# EAGLE board SensorModuleV2 (EAGLE 8.1.1)
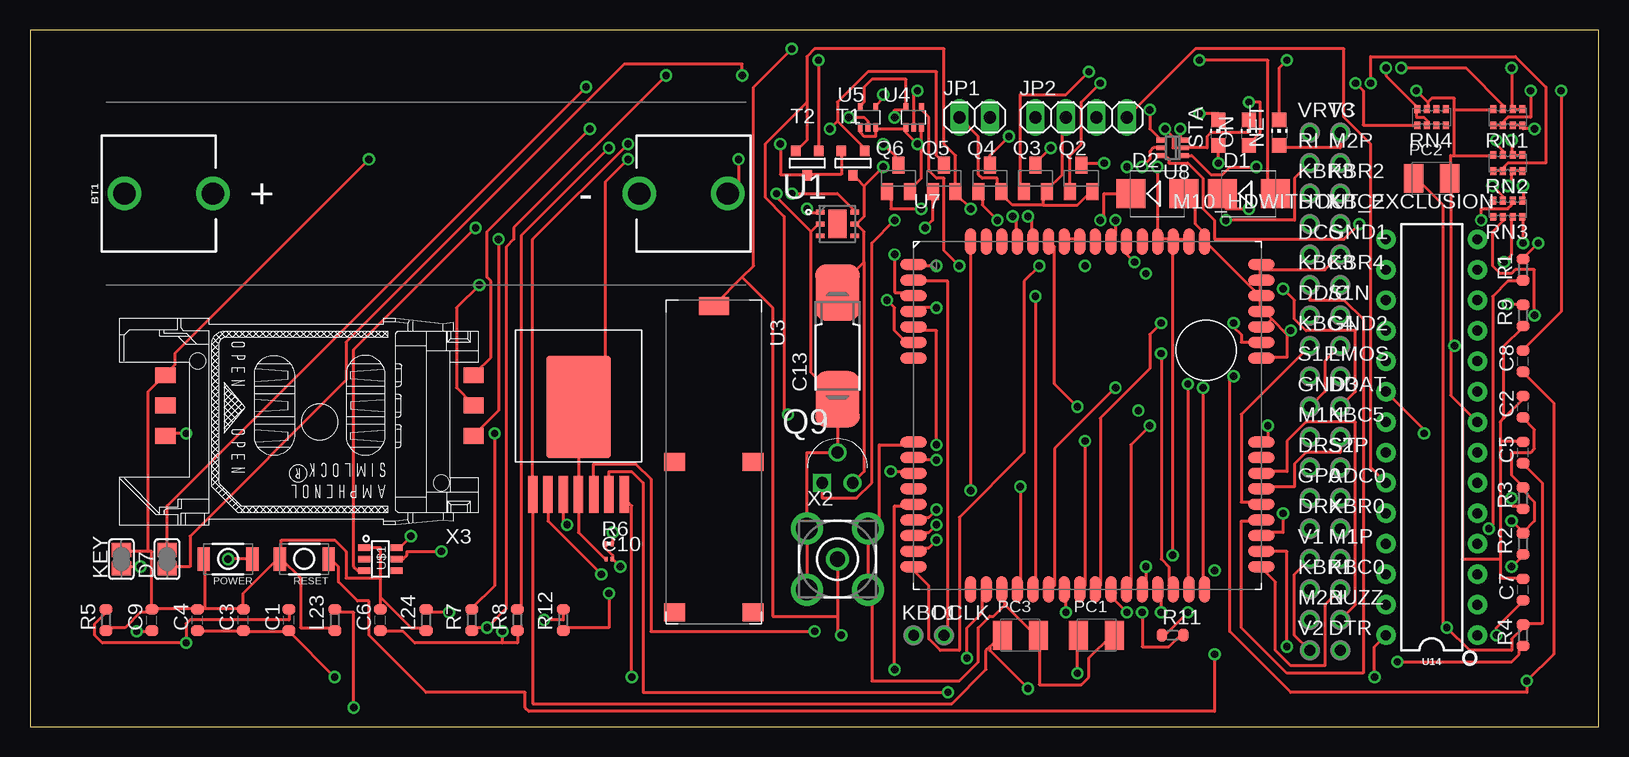
[diagram p0: board, top side]
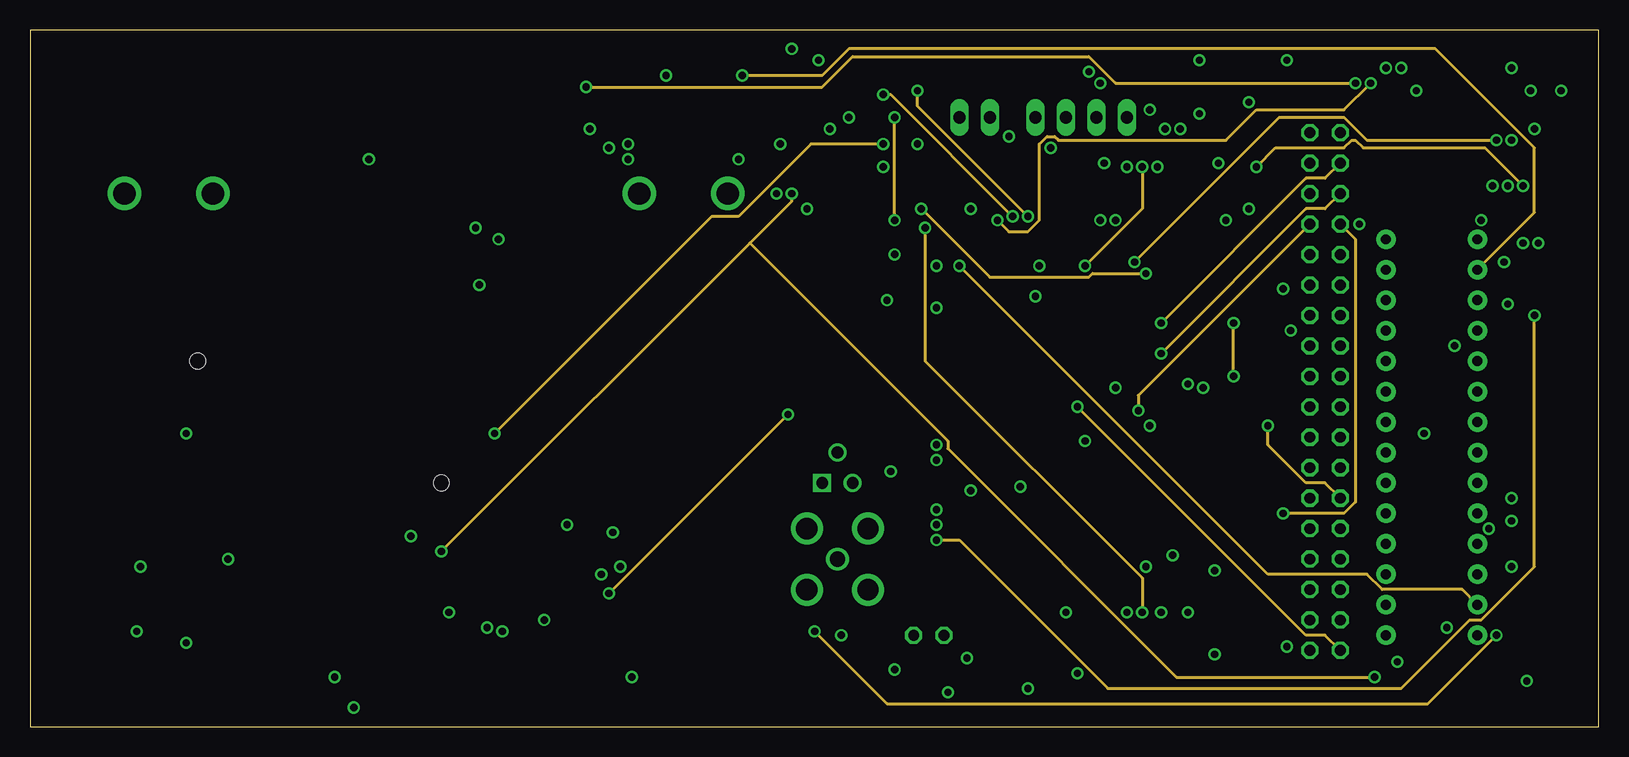
[diagram p1: board, inner layer Route2]
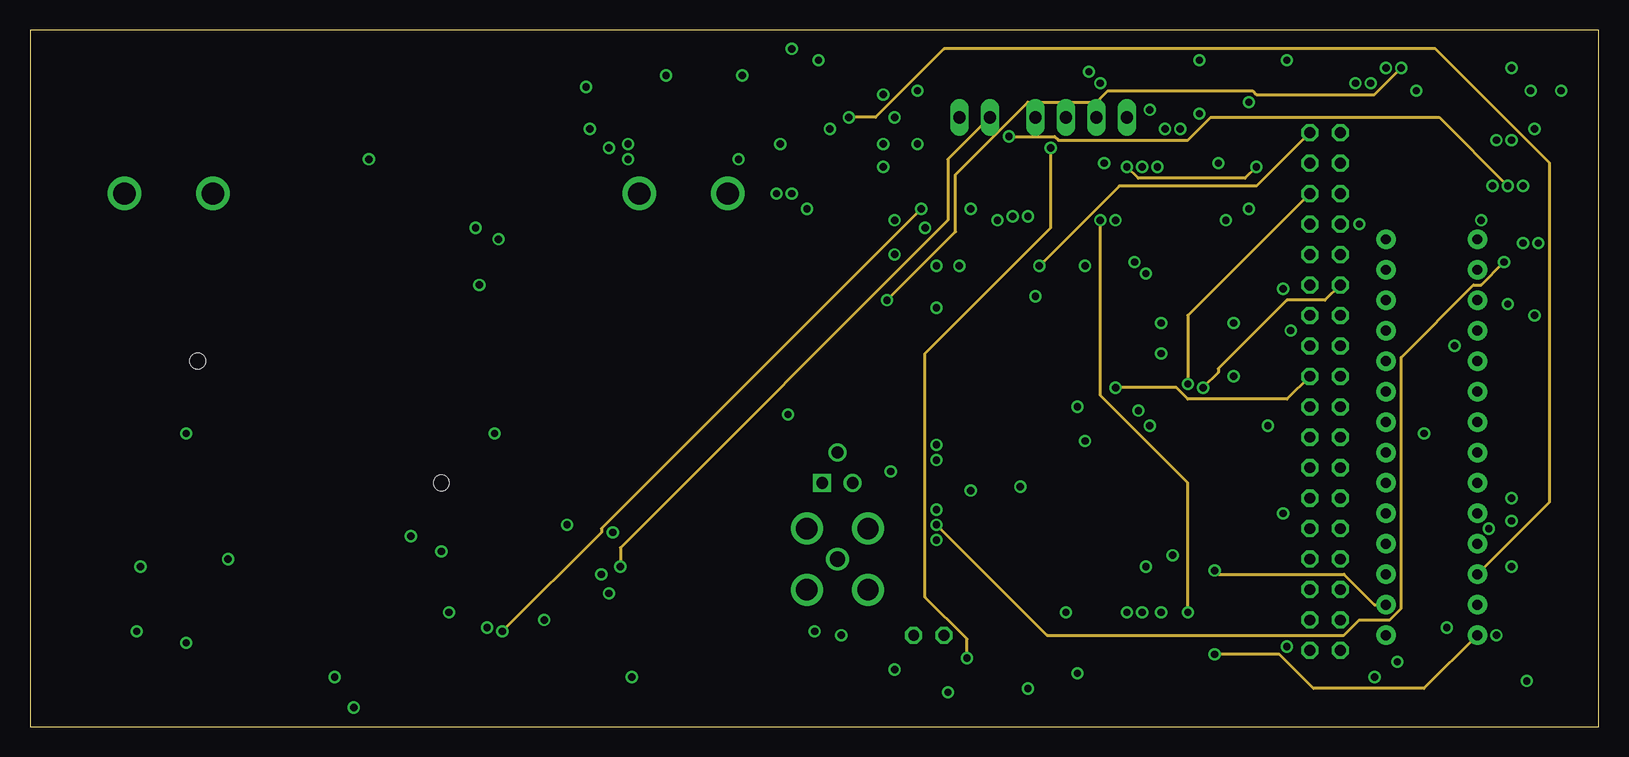
[diagram p2: board, inner layer Route3]
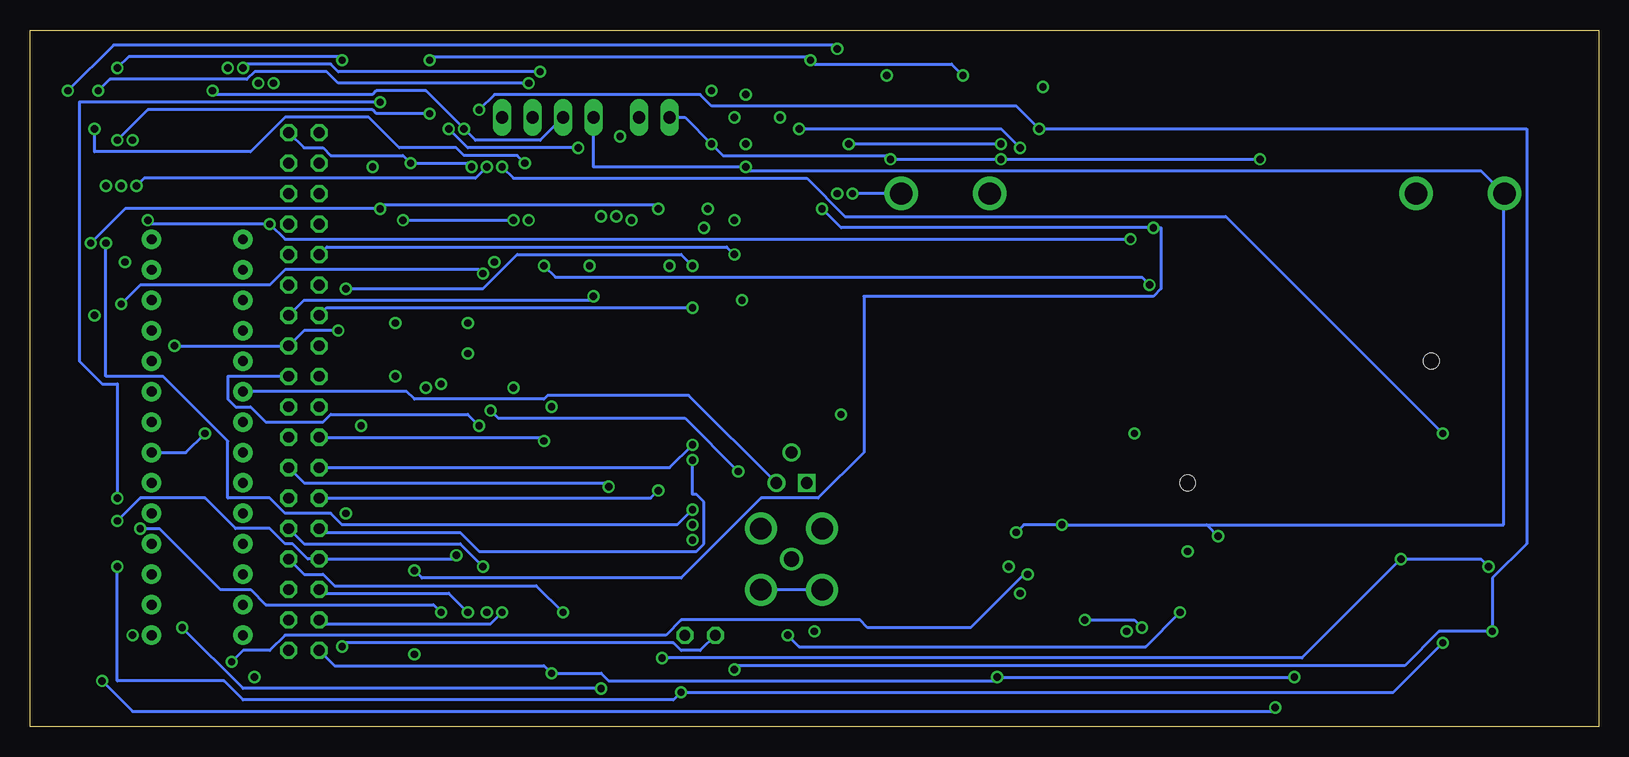
[diagram p3: board, bottom side, seen from below]

Size 130.79 x 58.09 mm. Coordinates in mm from the lower left corner, seen from the top.
Outline: 0,0 130.79,0 130.79,58.09 0,58.09 0,0
Copper layers (1*2*3*16): Top 0.035mm / dielectric 1.5mm / Route2 0.035mm / dielectric 0.15mm / Route3 0.035mm / dielectric 0.2mm / Bottom 0.035mm
Design rules "default *": minimum track width 10mil, minimum drill 24mil, track to track 8mil, track to pad 8mil, pad to pad 8mil, via to via 8mil, smd to smd 8mil, copper to edge 40mil, drill to drill 8mil, minimum pad ring 10mil, minimum via ring 8mil, stop-mask expansion 4mil, vias tented up to drill 0mil, thermal gap 10mil
Net classes: 4 antenna: clearance 0.61 mm

## Footprints (pad centres in the part's own frame; a part is rotated, then mirrored left to right if it is on the bottom)
P1-09 = drill 0.9 pad 1.422 octagon: TP 0,0
BATTERY-AA = drill 1.854: GND@1 25.146,0; GND@2 17.78,0; PWR@1 -25.146,0; PWR@2 -17.78,0
C0603-ROUND = smd 0.898 x 1.1: 1 -0.889,0; 2 0.889,0
C0201 = smd 0.25 x 0.35: 1 -0.25,0; 2 0.25,0
085CS_1AW = smd 4.7 x 3.7: + 4.45,0; - -4.45,0
SMB = smd 2.4 x 2.4: A 2.2,0; C -2.2,0
SJ = smd 1.168 x 1.6: 1 -0.762,0; 2 0.762,0
1X02 = drill 1.016 long: 1 -1.27,0; 2 1.27,0
1X04 = drill 1.016 long: 1 -3.81,0; 2 -1.27,0; 3 1.27,0; 4 3.81,0
R0603-ROUND = smd 0.898 x 1.1: 1 -0.889,0; 2 0.889,0
CHIP-LED0805 = smd 1.2 x 1.2: A 0,-1.05; C 0,1.05
SMC_B = smd 1.6 x 2.4: + -1.5,0; - 1.5,0
SMD_157SW = smd 1.016 x 1.981: 1 -2.032,0; 2 2.032,0
SOT23-BEC = smd 1 x 1.4: B -0.95,-1.1; C 0,1.1; E 0.95,-1.1
TO127P254X749-3 = drill 0.991 square: 1 -2.54,-2.54 | drill 0.991: 2 -1.27,0; 3 0,-2.54
R0201 = smd 0.28 x 0.43: 1 -0.255,0; 2 0.255,0
CAY16 = smd 0.5 x 0.65: 1 -1.2,-0.675; 2 -0.4,-0.675; 3 0.4,-0.675; 4 1.2,-0.675; 5 1.2,0.675; 6 0.4,0.675; 7 -0.4,0.675; 8 -1.2,0.675
SOT-23 = smd 0.787 x 0.889: 1 0.025,-1.016; 2 -0.94,1.016; 3 0.991,1.016
DFN300X300X110-7N = smd 0.711 x 0.406: 1 -1.448,0.991; 2 -1.448,0; 3 -1.448,-0.991; 4 1.448,-0.991; 5 1.448,0; 6 1.448,0.991 | smd 1.499 x 2.388: 7 0,0
CALVUS_5BAND_SMD_A10340_0MM_EXCLUSION = smd 2.5 x 1.5: FEED 3.95,0.5 | smd 1.75 x 1.5: FIXINGPOINT$1 0.7,26.05; FIXINGPOINT$2 7.22,26.05; FIXINGPOINT$3 0.7,13.49; FIXINGPOINT$4 7.22,13.49
SC70-5 = smd 0.4 x 0.7: 1 -0.65,-0.85; 2 0,-0.85; 3 0.65,-0.85; 4 0.65,0.85; 5 -0.65,0.85
TZA-7 = smd 0.89 x 3.06: 1 -3.81,-7.305; 2 -2.54,-7.305; 3 -1.27,-7.305; 4 0,-7.305; 5 1.27,-7.305; 6 2.54,-7.305; 7 3.81,-7.305 | smd 5.35 x 8.54: TAB 0,0
M10_HD_WITHOUT_EXCLUSION = smd 2.2 x 0.9: P$1 0,27.1; P$2 0,25.8; P$3 0,24.5; P$4 0,23.2; P$5 0,21.9; P$6 0,20.6; P$7 0,19.3; P$8 0,12.3; P$9 0,11; P$10 0,9.7; P$11 0,8.4; P$12 0,7.1; P$13 0,5.8; P$14 0,4.5; P$15 0,3.2; P$16 0,1.9; P$33 29,1.9; P$34 29,3.2; P$35 29,4.5; P$36 29,5.8; P$37 29,7.1; P$38 29,8.4; P$39 29,9.7; P$40 29,11; P$41 29,12.3; P$42 29,19.3; P$43 29,20.6; P$44 29,21.9; P$45 29,23.2; P$46 29,24.5; P$47 29,25.8; P$48 29,27.1 | smd 0.9 x 2.2: P$17 4.75,0; P$18 6.05,0; P$19 7.35,0; P$20 8.65,0; P$21 9.95,0; P$22 11.25,0; P$23 12.55,0; P$24 13.85,0; P$25 15.15,0; P$26 16.45,0; P$27 17.75,0; P$28 19.05,0; P$29 20.35,0; P$30 21.65,0; P$31 22.95,0; P$32 24.25,0; P$49 24.25,29; P$50 22.95,29; P$51 21.65,29; P$52 20.35,29; P$53 19.05,29; P$54 17.75,29; P$55 16.45,29; P$56 15.15,29; P$57 13.85,29; P$58 12.55,29; P$59 11.25,29; P$60 9.95,29; P$61 8.65,29; P$62 7.35,29; P$63 6.05,29; P$64 4.75,29
SC70_6L = smd 0.4 x 0.85: P$1 -0.65,-0.94; P$2 0,-0.94; P$3 0.65,-0.935; P$4 0.65,0.94; P$5 0,0.94; P$6 -0.65,0.94
DIP28 = drill 0.813 pad 1.626: 1 -16.51,-3.81; 2 -13.97,-3.81; 3 -11.43,-3.81; 4 -8.89,-3.81; 5 -6.35,-3.81; 6 -3.81,-3.81; 7 -1.27,-3.81; 8 1.27,-3.81; 9 3.81,-3.81; 10 6.35,-3.81; 11 8.89,-3.81; 12 11.43,-3.81; 13 13.97,-3.81; 14 16.51,-3.81; 15 16.51,3.81; 16 13.97,3.81; 17 11.43,3.81; 18 8.89,3.81; 19 6.35,3.81; 20 3.81,3.81; 21 1.27,3.81; 22 -1.27,3.81; 23 -3.81,3.81; 24 -6.35,3.81; 25 -8.89,3.81; 26 -11.43,3.81; 27 -13.97,3.81; 28 -16.51,3.81
SOT-23-6 = smd 1 x 0.55: 1 -1.35,0.95; 2 -1.35,0; 3 -1.35,-0.95; 4 1.35,-0.95; 5 1.35,0; 6 1.35,0.95
BU-SMA-V = drill 1.27: 1 0,0 | drill 1.778: 2 -2.55,2.55; 3 2.55,2.55; 4 2.55,-2.55; 5 -2.55,-2.55
CON-AMPHENOL_C707_10M006_512_2 = smd 1.7 x 1.3: C1 -12.85,-3.915; C2 -12.85,-1.375; C3 -12.85,1.165; C5 12.85,-3.915; C6 12.85,-1.375; C7 12.85,1.165 | hole 1.3: 10.16,-5.08; -10.16,5.08

## Placement (x,y rotation side)
ADC0  TPPAD1-09  [P1-09]  109.22,19.05 0 top
BT1  4.5V Battery  [BATTERY-AA]  33.02,44.45 0 top
BUZZ  TPPAD1-09  [P1-09]  109.22,8.89 0 top
C1  10n  [C0603-ROUND]  21.59,8.89 90 top
C2  100n  [C0603-ROUND]  124.46,26.67 90 top
C3  15p  [C0603-ROUND]  17.78,8.89 90 top
C4  56p  [C0603-ROUND]  13.97,8.89 90 top
C5  100n  [C0603-ROUND]  124.46,22.86 90 top
C6  220p_NM  [C0603-ROUND]  29.21,8.89 90 top
C7  10n  [C0603-ROUND]  124.46,11.43 90 top
C8  3.9pF Murata GQM1885C2A3R9BB01D  [C0603-ROUND]  124.46,30.48 90 top
C9  1u  [C0603-ROUND]  10.16,8.89 90 top
C10  1u  [C0201]  48.26,13.97 0 top
C13  2200u - 592D228X96R3X2T20H  [085CS_1AW]  67.31,31.75 90 top
D1  5V1  [SMB]  101.6,44.45 0 top
D2  5V1  [SMB]  93.98,44.45 0 top
D7  [SJ]  11.43,13.97 90 top
DCLK  TPPAD1-09  [P1-09]  76.2,7.62 0 top
DCS  TPPAD1-09  [P1-09]  106.68,39.37 0 top
DD/C  TPPAD1-09  [P1-09]  106.68,34.29 0 top
DDAT  TPPAD1-09  [P1-09]  109.22,26.67 0 top
DRST  TPPAD1-09  [P1-09]  106.68,21.59 0 top
DRX  TPPAD1-09  [P1-09]  106.68,16.51 0 top
DTR  TPPAD1-09  [P1-09]  109.22,6.35 0 top
DTX  TPPAD1-09  [P1-09]  106.68,41.91 0 top
GND1  TPPAD1-09  [P1-09]  109.22,39.37 0 top
GND2  TPPAD1-09  [P1-09]  109.22,31.75 0 top
GND3  TPPAD1-09  [P1-09]  106.68,26.67 0 top
GP0  TPPAD1-09  [P1-09]  106.68,19.05 0 top
JP1  Solar Array  [1X02]  78.74,50.8 0 top
JP2  Soil Hydrometer  [1X04]  87.63,50.8 0 top
KBC0  TPPAD1-09  [P1-09]  109.22,11.43 0 top
KBC1  TPPAD1-09  [P1-09]  73.66,7.62 0 top
KBC2  TPPAD1-09  [P1-09]  109.22,41.91 0 top
KBC3  TPPAD1-09  [P1-09]  106.68,36.83 0 top
KBC4  TPPAD1-09  [P1-09]  106.68,31.75 0 top
KBC5  TPPAD1-09  [P1-09]  109.22,24.13 0 top
KBR0  TPPAD1-09  [P1-09]  109.22,16.51 0 top
KBR1  TPPAD1-09  [P1-09]  106.68,11.43 0 top
KBR2  TPPAD1-09  [P1-09]  109.22,44.45 0 top
KBR3  TPPAD1-09  [P1-09]  106.68,44.45 0 top
KBR4  TPPAD1-09  [P1-09]  109.22,36.83 0 top
KEY  [SJ]  7.62,13.97 90 top
L23  6.8nH Murata LQG18HN6N8J00D  [R0603-ROUND]  25.4,8.89 90 top
L24  3.3nH Murata LQG18HN3N3S00D  [R0603-ROUND]  33.02,8.89 90 top
LMOS  TPPAD1-09  [P1-09]  109.22,29.21 0 top
M1N  TPPAD1-09  [P1-09]  106.68,24.13 0 top
M1P  TPPAD1-09  [P1-09]  109.22,13.97 0 top
M2N  TPPAD1-09  [P1-09]  106.68,8.89 0 top
M2P  TPPAD1-09  [P1-09]  109.22,46.99 0 top
NET  YELLOW  [CHIP-LED0805]  104.14,49.53 0 top
ON  YELLOW  [CHIP-LED0805]  101.6,49.53 0 top
PC1  100u - C3225X5R0J107M  [SMC_B]  88.9,7.62 0 top
PC2  22u  [SMC_B]  116.84,45.72 0 top
PC3  22u  [SMC_B]  82.55,7.62 0 top
POWER  [SMD_157SW]  16.51,13.97 180 top
Q2  BC847-25  [SOT23-BEC]  87.63,45.72 0 top
Q3  BC847-25  [SOT23-BEC]  83.82,45.72 0 top
Q4  BC847-25  [SOT23-BEC]  80.01,45.72 0 top
Q5  2N2907  [SOT23-BEC]  76.2,45.72 0 top
Q6  2N2222  [SOT23-BEC]  72.39,45.72 0 top
Q9  LE33CZ  [TO127P254X749-3]  68.58,22.86 0 top
R1  4k7  [R0603-ROUND]  124.46,38.1 90 top
R2  52K3  [R0603-ROUND]  124.46,15.24 90 top
R3  470R/1K  [R0603-ROUND]  124.46,19.05 90 top
R4  100K  [R0603-ROUND]  124.46,7.62 90 top
R5  12k7  [R0603-ROUND]  6.35,8.89 90 top
R6  100  [R0201]  48.26,15.24 0 top
R7  4k7  [R0603-ROUND]  36.83,8.89 90 top
R8  3K9  [R0603-ROUND]  40.64,8.89 90 top
R9  1K  [R0603-ROUND]  124.46,34.29 90 top
R11  2k2  [R0603-ROUND]  95.25,7.62 0 top
R12  4k7  [R0603-ROUND]  44.45,8.89 90 top
RESET  [SMD_157SW]  22.86,13.97 180 top
RI  TPPAD1-09  [P1-09]  106.68,46.99 0 top
RN1  1K  [CAY16]  123.19,50.8 0 top
RN2  1K  [CAY16]  123.19,46.99 0 top
RN3  22R  [CAY16]  123.19,43.18 0 top
RN4  1K  [CAY16]  116.84,50.8 0 top
S1N  TPPAD1-09  [P1-09]  109.22,34.29 0 top
S1P  TPPAD1-09  [P1-09]  106.68,29.21 0 top
S2P  TPPAD1-09  [P1-09]  109.22,21.59 0 top
STA  YELLOW  [CHIP-LED0805]  99.06,49.53 0 top
T1  FDN340P  [SOT-23]  68.58,46.99 0 top
T2  FDN340P  [SOT-23]  64.77,46.99 0 top
U1  SHT21  [DFN300X300X110-7N]  67.31,41.91 0 top
U3  CALVUS_5BAND_SMD_A103400MM_EXCLUSION  [CALVUS_5BAND_SMD_A10340_0MM_EXCLUSION]  60.96,35.56 180 top
U4  74LVC1G125DCK  [SC70-5]  73.66,50.8 0 top
U5  74LVC1G125DCK  [SC70-5]  69.85,50.8 0 top
U6  LMZ12002TZ-ADJ/NOPB  [TZA-7]  45.72,26.67 0 top
U7  M10_HDWITHOUT_EXCLUSION  [M10_HD_WITHOUT_EXCLUSION]  73.66,11.43 0 top
U8  SMF05C  [SC70_6L]  95.25,48.26 90 top
U14  328P  [DIP28]  116.84,24.13 90 top
U$1  VISHAY_VEML6070  [SOT-23-6]  29.21,13.97 0 top
V1  TPPAD1-09  [P1-09]  106.68,13.97 0 top
V2  TPPAD1-09  [P1-09]  106.68,6.35 0 top
V3  TPPAD1-09  [P1-09]  109.22,49.53 0 top
VRTC  TPPAD1-09  [P1-09]  106.68,49.53 0 top
X2  BU-SMA-V  [BU-SMA-V]  67.31,13.97 0 top
X3  CCM03-3002 R102  [CON-AMPHENOL_C707_10M006_512_2]  24.13,25.4 180 top

## Library data of the parts
ADC0 BUZZ DCLK DCS DD/C DDAT DRST DRX DTR DTX GND1-GND3 GP0 KBC0 KBC1-KBC5 KBR0 KBR1-KBR4 LMOS M1N M1P M2N M2P RI S1N S1P S2P V1-V3 VRTC = testpad
BT1 = SparkFun-Batteries; PROD_ID: BATT-08316; SF_SKU: PRT-07949
C1-C9 L23 L24 POWER R1-R5 R7-R9 R11 R12 RESET U3 U6 U8 = SmartPrj
C10 R6 = resistor
C13 = rcl
D1 = diode; ZENER: 5V1
D2 = diode
D7 KEY = jumper
JP1 JP2 = pinhead
NET ON STA = led
PC1 = rcl; PN: C3225X5R0J107M
PC2 PC3 = rcl; PN: C3225X5R1C226M
Q2-Q4 = transistor-npn
Q5 Q6 = transistor-neu-to92; FOOTPRINT: SOT23
Q9 = ST Microelctronics_By_element14_Batch_1; MPN: LE33CZ; OC_FARNELL: 9755349; OC_NEWARK: 26M0166; PACKAGE: TO-92; SUPPLIER: STMICROELECTRONICS
RN1-RN4 = resistor-dil
T1 T2 = zetex
U1 = Sensiron_HumiditySensor; MPN: SHT21; OC_FARNELL: 1855468; OC_NEWARK: 20T1172; PACKAGE: DFN-6; SUPPLIER: SENSIRION
U4 U5 = 74xx-little-us
U7 = GSM
U14 = SparkFun-IC-Microcontroller; PROD_ID: IC-09136
U$1 = Vishay VEML6070
X2 = con-coax; PN: 5-1814832-1
X3 = SmartPrj; OC_FARNELL: 1463072; OC_NEWARK: unknown

## Nets
+3V3: Q9.1 U4.5 U5.5
+5V: BT1.PWR@1 C13.+ JP2.1 Q9.3 R6.2 T1.1 U1.5 U6.3 U14.7 U14.20 U$1.6
A_RX: U4.4 U14.2
A_TX: U5.2 U14.3
ADC0: ADC0.TP U7.P$41
AGND: BT1.GND@1 C2.2 C3.2 C4.2 C5.2 C6.2 C7.2 C9.2 C10.1 C13.- D2.A GND1.TP GND2.TP GND3.TP JP1.1 JP2.2 KEY.2 L23.1 L24.1 ON.C PC1.- PC2.- PC3.- POWER.2 Q2.E Q3.E Q4.E Q6.E Q9.2 R5.1 R9.1 RESET.2 RN1.8 RN2.8 RN4.7 U1.2 U4.1 U4.3 U5.1 U5.3 U6.4 U6.TAB U7.P$8 U7.P$19 U7.P$42 U7.P$44 U7.P$45 U7.P$46 U7.P$47 U7.P$48 U7.P$49 U8.P$2 U14.8 U$1.1 X2.2 X2.3 X2.4 X2.5 X3.C5
ANT [antenna]: C8.1 L23.2 U7.P$43
ANTENA [antenna]: C8.2 L24.2 U3.FEED X2.1
BUZZ: BUZZ.TP U7.P$39
D7: D7.1 U14.13
DBG_RXD: DRX.TP U7.P$9
DBG_TXD: DTX.TP U7.P$10
DISP_CLK: DCLK.TP U7.P$2
DISP_CS: DCS.TP U7.P$3
DISP_D/C: DD/C.TP U7.P$4
DISP_DATA: DDAT.TP U7.P$1
DISP_RST: DRST.TP U7.P$5
DTR: DTR.TP U7.P$59
FB: C1.2 R2.1 R5.2 U6.6
GPIO0: GP0.TP U7.P$64
KBC0: KBC0.TP U7.P$33
KBC1: KBC1.TP U7.P$34
KBC2: KBC2.TP U7.P$35
KBC3: KBC3.TP U7.P$36
KBC4: KBC4.TP U7.P$37
KBC5: KBC5.TP U7.P$38
KBR0: KBR0.TP U7.P$28
KBR1: KBR1.TP U7.P$29
KBR2: KBR2.TP U7.P$30
KBR3: KBR3.TP U7.P$31
KBR4: KBR4.TP U7.P$32
LIGHT_MOS: LMOS.TP U7.P$27
MIC1N: M1N.TP U7.P$24
MIC1P: M1P.TP U7.P$23
MIC2N: M2N.TP U7.P$26
MIC2P: M2P.TP U7.P$25
N$1: C10.2 JP1.2 R6.1
N$2: ON.A R3.1
N$4: Q3.B RN4.2 RN4.8
N$6: U7.P$57 U7.P$58
N$7: D7.2 RN4.1
N$8: RI.TP U7.P$55
N$9: Q5.C R8.2 T1.3
N$10: Q6.C R7.2
N$11: C6.1 Q6.B R8.1 R9.2
N$12: Q5.B R11.2
N$13: D1.A R7.1 R12.2 T2.3
N$14: D2.C R1.1 R11.1
NETB: Q2.B RN1.1 RN1.2
NETL: NET.C RN1.5 RN1.6
NETLIGHT: RN1.7 U7.P$6
NETR: Q2.C RN1.3 RN1.4
PWRIN: C5.1 PC2.+ PC3.+ R4.2 T1.2 T2.1 U6.1
PWRKEY: KEY.1 POWER.1 Q3.C U7.P$18 U8.P$3
RESET_ARDUINO: RESET.1 U14.1
RON: R4.1 U6.2
RXD_3V: U5.4 U7.P$61
SCL: U1.6 U14.28 U$1.5
SDA: U1.1 U14.27 U$1.3
SIM_CLK: RN3.3 U7.P$14
SIM_CLKR: RN3.6 U8.P$6 X3.C3
SIM_DATA: RN3.4 U7.P$13
SIM_DATAR: RN3.5 U8.P$1 X3.C7
SIM_RST: RN3.2 U7.P$15
SIM_RSTR: RN3.7 U8.P$5 X3.C2
SIM_VDD: C9.1 U7.P$12 U8.P$4 X3.C1
SOIL_HYDRO_ANALOG: JP2.4 U14.23
SPK1N: S1N.TP U7.P$21
SPK1P: S1P.TP U7.P$22
SPK2P: S2P.TP U7.P$20
SS: C7.1 U6.5
STATUS: RN2.7 U7.P$54
STATUSB: Q4.B RN2.1 RN2.2
STATUSL: RN2.5 RN2.6 STA.C
STATUSR: Q4.C RN2.3 RN2.4
TXD_3V: U4.2 U7.P$60
VBATT: C1.1 C2.1 C3.1 C4.1 NET.A PC1.+ R2.2 R3.2 STA.A U6.7 U7.P$50 U7.P$51 U7.P$52 V1.TP V2.TP V3.TP
VIN: D1.C Q5.E R1.2 R12.1 T2.2
VRTC: U7.P$16 VRTC.TP

## Tracks (layer width: path | path; a pad name or v marks a point on that pad's centre or on a via)
+3V3  (via drill 0.61)
  Top 0.254: U5.5 69.22,51.75 69.53,52.07 69.53,53.34 70.17,53.97 73.03,53.97 73.03,51.75 U4.5 73.03,51.43 72.07,51.43 v72.07,50.8 | v72.07,42.23 70.17,40.32 70.17,20.32 68.9,19.05 66.04,19.05 Q9.1
  Route2 0.254: v72.07,42.23 v72.07,50.8
+5V  (via drill 0.61)
  Top 0.254: v48.58,16.19 48.58,15.24 R6.2 | v44.77,16.83 44.45,17.14 U6.3 | v31.75,15.87 30.8,14.92 U$1.6 | U14.20 116.2,24.76 v116.2,24.45 | 68.9,41.91 69.53,42.55 69.53,45.08 | 69.53,45.08 68.9,45.72 T1.1 | 68.9,41.91 69.53,41.27 69.53,38.73 | 69.53,38.73 67.31,36.51 C13.+ | 68.9,41.91 U1.5 | Q9.3 69.53,21.27 69.53,38.73 | 69.53,45.08 v71.12,46.67
  Bottom 0.254: v48.58,16.19 47.94,16.83 v44.77,16.83 32.7,16.83 | 32.7,16.83 v31.75,15.87 | 7.94,44.45 7.94,16.83 32.7,16.83 | v116.2,24.45 117.79,22.86 U14.7 | JP2.1 83.82,46.67 v71.12,46.67 70.8,46.36 9.84,46.36 7.94,44.45 | U14.20 99.38,27.94 98.74,27.3 87.95,27.3 87.63,27.62 75.88,27.62 Q9.3 | 7.94,44.45 BT1.PWR@1
A_RX  (via drill 0.61)
  Top 0.254: v77.47,38.42 76.2,39.69 76.2,45.72 75.56,45.72 74.93,46.36 74.93,50.8 74.29,51.43 U4.4
  Route2 0.254: v77.47,38.42 103.19,12.7 111.44,12.7 112.71,11.43 119.38,11.43 U14.2
A_TX  (via drill 0.61)
  Top 0.254: U5.2 69.85,50.48 69.53,50.8 v68.26,50.8
  Route3 0.254: v68.26,50.8 70.48,50.8 76.2,56.52 117.16,56.52 126.68,46.99 126.68,18.73 U14.3
ADC0  (via drill 0.61)
  Top 0.254: v103.19,25.08 103.19,24.13 102.87,23.81 U7.P$41
  Route2 0.254: v103.19,25.08 103.19,23.5 106.36,20.32 107.95,20.32 ADC0.TP
AGND  (via drill 0.61)
  Top 0.254: GND3.TP 107.95,27.94 107.95,30.48 GND2.TP | 104.78,32.7 104.78,30.8 102.87,30.8 U7.P$42 | 103.5,33.97 102.87,34.61 U7.P$45 102.55,34.92 102.55,35.88 | 103.5,33.97 104.78,32.7 | 103.5,33.97 102.87,33.34 U7.P$44 | 102.55,38.1 102.55,37.47 U7.P$47 102.55,37.15 102.55,36.19 U7.P$46 102.55,35.88 | 102.55,38.1 102.55,38.42 U7.P$48 102.55,38.1 | 102.55,35.88 98.11,40.32 U7.P$49 97.79,40.64 97.79,41.27 97.16,41.91 97.16,43.5 96.2,44.45 D2.A | GND1.TP 107.95,38.1 102.55,38.1 | 104.78,32.7 v105.09,33.02 | 122.56,23.81 122.56,25.4 122.87,25.72 | 122.56,23.81 122.56,13.97 | 122.56,13.97 122.56,12.38 124.46,12.38 C7.2 | 122.87,25.72 124.46,27.3 C2.2 | 122.56,23.81 124.46,23.81 C5.2 | 122.87,25.72 122.87,31.75 124.46,33.34 R9.1 | 118.75,47.62 118.43,47.62 118.43,45.72 | 118.75,47.62 121.92,47.62 RN2.8 | 116.52,52.07 116.52,51.75 RN4.7 | 116.52,52.07 116.84,52.39 118.75,52.39 118.75,51.43 | 118.75,47.62 118.75,51.43 | 118.75,51.43 121.92,51.43 RN1.8 | 119.38,26.67 118.43,27.62 118.43,31.75 | 119.38,26.67 U14.8 | 118.43,45.72 118.43,31.75 | 118.43,45.72 PC2.- | 122.56,13.97 119.38,13.97 119.38,26.67 | 118.43,31.75 v118.75,31.75 | 65.09,41.27 65.72,41.91 U1.2 | 65.09,41.27 65.09,29.53 C13.- Q9.2 64.77,22.86 64.77,16.83 X2.2 X2.5 | 81.28,10.16 81.28,11.43 U7.P$19 | 81.28,10.16 83.82,7.62 PC3.- 84.14,7.62 84.14,3.49 87.63,3.49 88.27,4.13 88.27,5.71 90.17,7.62 PC1.- | U7.P$8 73.66,23.5 70.8,23.5 70.8,17.46 X2.3 X2.4 70.17,11.11 70.17,3.81 77.47,3.81 79.06,5.4 79.06,8.25 80.01,9.21 80.33,9.21 81.28,10.16 | C6.2 29.21,10.79 | 29.21,10.79 29.21,12.38 | 29.21,12.38 29.21,14.92 27.94,14.92 U$1.1 | 29.21,10.79 31.75,8.25 33.02,8.25 L24.1
  Top 0.254: 20.95,13.97 22.54,12.38 22.54,8.25 25.4,8.25 L23.1 | R5.1 6.35,8.25 7.94,8.25 9.21,9.52 10.16,9.52 C9.2 10.16,9.84 | 10.16,9.84 13.97,9.84 | 13.97,9.84 14.6,9.84 | 14.6,9.84 17.78,9.84 | 13.97,9.84 C4.2 | 9.84,14.6 10.16,14.6 10.16,9.84 | 9.84,14.6 7.62,14.6 KEY.2 | 9.84,14.6 9.84,27.94 11.11,29.21 X3.C5 11.43,29.53 12.06,30.16 12.06,31.11 v28.26,47.31 | 14.6,9.84 14.6,13.97 POWER.2 | 17.78,9.84 17.78,11.11 20.64,13.97 RESET.2 20.95,13.97 | 17.78,9.84 C3.2 | 29.21,12.38 26.35,12.38 26.35,14.6 25.4,15.56 20.95,15.56 20.95,13.97 | C10.1 47.94,13.97 45.72,16.19 U6.4 U6.TAB 47.94,28.89 47.94,45.4 v49.85,47.31 | 70.48,49.85 70.48,49.21 69.53,49.21 69.22,49.53 69.22,49.85 U5.1 | 70.48,49.85 73.03,49.85 | 70.48,49.85 U5.3 | 74.29,48.26 74.29,45.72 73.34,44.77 Q6.E | 74.29,48.26 74.29,49.85 U4.3 | 73.03,49.85 73.03,49.53 v73.98,48.58 74.29,48.26 | 73.03,49.85 U4.1 | ON.C 101.6,49.53 98.42,49.53 98.11,49.21 98.11,48.26 U8.P$2 95.25,48.26 95.25,49.21 v94.61,49.85 | 84.45,43.5 81.91,43.5 80.96,44.45 Q4.E 80.64,44.77 80.64,45.72 79.38,45.72 79.06,46.04 79.06,49.21 JP1.1 | 84.45,43.5 84.45,44.45 Q3.E 84.77,44.77 86.04,46.04 86.04,50.48 JP2.2 | 84.45,43.5 87.31,43.5 88.27,44.45 Q2.E | v59.05,47.31 59.05,45.08 58.42,44.45 BT1.GND@1 | 65.09,41.27 62.23,44.13 v62.23,44.45 | v115.57,53.02 116.52,52.07
  Bottom 0.254: v105.09,33.02 107.95,33.02 GND2.TP v118.75,31.75 | X2.5 X2.4 | JP2.2 88.27,48.89 93.66,48.89 v94.61,49.85 97.79,53.02 101.92,53.02 102.23,52.7 115.25,52.7 v115.57,53.02 | JP1.1 76.2,50.8 v73.98,48.58 73.03,47.62 59.37,47.62 v59.05,47.31 v49.85,47.31 v28.26,47.31 | BT1.GND@1 v62.23,44.45
ANT  (via drill 0.61)
  Top 0.254: v26.99,1.59 26.99,9.52 25.4,9.52 L23.2 | C8.1 124.46,29.53 127,26.99 127,6.03 v124.78,3.81 124.78,2.86 105.09,2.86 100.01,7.94 100.01,28.89 v100.33,29.21 | v100.33,33.66 100.33,33.34 100.97,32.7 100.97,32.07 102.55,32.07 U7.P$43
  Route2 0.254: v100.33,29.21 v100.33,33.66
  Bottom 0.254: v26.99,1.59 27.3,1.27 122.24,1.27 v124.78,3.81
ANTENA  (via drill 0.61)
  Top 0.254: v34.92,9.52 33.02,9.52 L24.2 | v67.63,7.62 67.31,7.94 67.31,9.21 | X2.1 67.31,9.21 | v127.63,53.02 127.63,34.61 124.46,31.43 C8.2 | v63.5,56.52 60.32,53.34 60.32,38.42 59.37,37.47 | 59.37,37.47 57.15,35.24 U3.FEED | 67.31,9.21 61.91,9.21 61.91,34.92 59.37,37.47
  Bottom 0.254: v34.92,9.52 37.78,6.67 66.67,6.67 v67.63,7.62 | v127.63,53.02 123.82,56.83 63.82,56.83 v63.5,56.52
BUZZ
  Top 0.254: BUZZ.TP 110.49,10.16 110.49,25.4 106.36,25.4 104.78,23.81 104.78,21.27 102.87,21.27 U7.P$39
D7  (via drill 0.61)
  Top 0.254: v59.37,54.29 59.37,55.24 49.53,55.24 26.35,32.07 26.35,28.89 13.33,15.87 13.33,13.33 11.43,13.33 D7.1
  Route2 0.254: v59.37,54.29 66.04,54.29 68.26,56.52 117.16,56.52 125.41,48.26 125.41,42.86 U14.13
DBG_RXD  (via drill 0.61)
  Top 0.254: v75.56,22.22 73.66,22.22 U7.P$9
  Bottom 0.254: v75.56,22.22 75.56,19.37 75.25,19.37 74.61,18.73 74.61,15.24 75.25,14.6 93.34,14.6 94.93,16.19 106.36,16.19 DRX.TP
DBG_TXD  (via drill 0.61)
  Top 0.254: v71.75,21.27 73.66,21.27 U7.P$10
  Route2 0.254: v92.39,26.35 92.39,27.62 DTX.TP
  Bottom 0.254: v71.75,21.27 76.2,25.72 91.76,25.72 v92.39,26.35
DISP_CLK
  Top 0.254: DCLK.TP 76.52,7.94 76.52,37.15 73.66,37.15 U7.P$2
DISP_CS  (via drill 0.61)
  Top 0.254: v72.07,39.37 72.07,36.19 73.66,36.19 U7.P$3
  Bottom 0.254: v72.07,39.37 72.71,40 106.04,40 DCS.TP
DISP_D/C  (via drill 0.61)
  Top 0.254: v75.56,34.92 73.66,34.92 U7.P$4
  Bottom 0.254: v75.56,34.92 106.04,34.92 DD/C.TP
DISP_DATA  (via drill 0.61)
  Top 0.254: v75.56,38.42 73.66,38.42 U7.P$1 | v104.46,36.51 105.41,35.56 105.41,33.97 106.36,33.02 110.49,33.02 110.49,27.94 DDAT.TP
  Bottom 0.254: v75.56,38.42 76.52,39.37 90.17,39.37 93.03,36.51 v104.46,36.51
DISP_RST  (via drill 0.61)
  Top 0.254: v75.56,23.5 75.56,33.02 73.66,33.02 U7.P$5
  Bottom 0.254: v75.56,23.5 77.47,21.59 DRST.TP
DTR  (via drill 0.61)
  Top 0.254: v87.31,26.67 85.41,28.57 85.41,40 85.09,40.32 U7.P$59
  Route2 0.254: v87.31,26.67 106.36,7.62 107.95,7.62 DTR.TP
FB  (via drill 0.61)
  Top 0.254: C1.2 21.59,8.89 13.33,8.89 13.02,8.57 v13.02,6.98 6.03,6.98 5.4,7.62 5.4,8.57 6.35,9.52 R5.2 | v123.51,13.33 124.46,14.29 R2.1 | v76.52,2.86 51.12,2.86 51.12,20.32 50.16,21.27 48.26,21.27 U6.6
  Bottom 0.254: v123.51,13.33 123.51,3.81 114.62,3.81 113.03,2.22 77.15,2.22 v76.52,2.86 17.14,2.86 v13.02,6.98
GPIO0  (via drill 0.61)
  Top 0.254: v78.42,19.68 78.42,40.32 U7.P$64
  Bottom 0.254: v78.42,19.68 79.06,19.05 GP0.TP
KBC0
  Top 0.254: KBC0.TP 107.95,10.16 107.95,5.08 105.09,5.08 103.82,6.35 103.82,12.06 102.87,13.02 U7.P$33
KBC1  (via drill 0.61)
  Top 0.254: v104.78,6.67 104.78,14.6 102.87,14.6 U7.P$34
  Bottom 0.254: v104.78,6.67 104.46,6.98 77.15,6.98 76.52,6.35 74.93,6.35 KBC1.TP
KBC2  (via drill 0.61)
  Top 0.254: v104.46,17.78 104.46,16.19 102.87,16.19 U7.P$35
  Route2 0.254: v104.46,17.78 109.54,17.78 110.49,18.73 110.49,40.64 KBC2.TP
KBC3
  Top 0.254: KBC3.TP 106.68,35.56 109.54,35.56 111.12,33.97 111.12,4.44 104.78,4.44 100.97,8.25 100.97,17.14 102.55,17.14 U7.P$36
KBC4
  Top 0.254: KBC4.TP 100.97,26.04 100.97,18.73 102.55,18.73 U7.P$37
KBC5
  Top 0.254: KBC5.TP 109.22,22.86 106.36,22.86 105.41,21.91 105.41,20 102.87,20 U7.P$38
KBR0  (via drill 0.61)
  Top 0.254: U7.P$28 93.03,11.75 v93.03,13.33
  Bottom 0.254: v93.03,13.33 94.93,15.24 107.95,15.24 KBR0.TP
KBR1  (via drill 0.61)
  Top 0.254: v94.3,9.52 94.3,11.43 U7.P$29
  Bottom 0.254: v94.3,9.52 95.88,11.11 106.36,11.11 KBR1.TP
KBR2  (via drill 0.61)
  Top 0.254: v94.3,31.11 94.3,13.97 94.93,13.33 94.93,11.75 95.25,11.43 U7.P$30
  Route2 0.254: v94.3,31.11 106.36,43.18 107.95,43.18 KBR2.TP
KBR3  (via drill 0.61)
  Top 0.254: v96.52,28.57 96.52,11.43 U7.P$31
  Route3 0.254: v96.52,28.57 96.52,34.29 KBR3.TP
KBR4  (via drill 0.61)
  Top 0.254: v97.79,28.26 97.79,11.43 U7.P$32
  Route3 0.254: v97.79,28.26 99.06,29.53 99.06,29.84 104.78,35.56 107.95,35.56 KBR4.TP
LIGHT_MOS  (via drill 0.61)
  Top 0.254: v93.34,25.08 91.76,23.5 91.76,11.75 91.44,11.43 U7.P$27
  Bottom 0.254: v93.34,25.08 94.3,26.04 105.73,26.04 106.36,25.4 111.12,25.4 112.4,26.67 113.66,26.67 114.3,27.3 114.3,29.21 LMOS.TP
MIC1N  (via drill 0.61)
  Top 0.254: v87.95,23.81 87.95,11.75 87.63,11.43 U7.P$24
  Bottom 0.254: v87.95,23.81 88.27,24.13 M1N.TP
MIC1P  (via drill 0.61)
  Top 0.254: v86.36,9.52 86.36,11.43 U7.P$23
  Bottom 0.254: v86.36,9.52 88.58,11.75 105.41,11.75 106.36,12.7 107.95,12.7 M1P.TP
MIC2N  (via drill 0.61)
  Top 0.254: v91.44,9.52 90.49,10.48 90.49,11.11 90.17,11.43 U7.P$26
  Bottom 0.254: v91.44,9.52 92.39,8.57 106.36,8.57 M2N.TP
MIC2P  (via drill 0.61)
  Top 0.254: v94.3,33.66 93.34,32.7 93.34,29.84 89.22,25.72 89.22,11.75 88.9,11.43 U7.P$25
  Route2 0.254: v94.3,33.66 106.36,45.72 107.95,45.72 M2P.TP
N$1  (via drill 0.61)
  Top 0.254: 48.58,13.97 48.58,14.29 47.94,14.92 47.94,15.24 R6.1 | v49.21,13.33 48.58,13.97 | 48.58,13.97 C10.2
  Route3 0.254: v49.21,13.33 49.21,14.92 76.52,42.23 76.52,47.31 JP1.2
N$2  (via drill 0.61)
  Top 0.254: v123.51,19.05 123.51,18.41 124.46,18.41 R3.1 | v101.6,52.07 102.55,52.07 102.55,49.53 101.6,48.58 ON.A
  Bottom 0.254: v123.51,19.05 123.51,28.57 124.78,28.57 126.68,30.48 126.68,52.07 v101.6,52.07
N$4  (via drill 0.61)
  Top 0.254: RN4.2 116.52,50.16 116.52,50.48 116.2,50.8 115.57,50.8 115.57,51.43 RN4.8 115.57,51.75 113.03,54.29 v113.03,54.93 | v88.27,54.61 86.36,52.7 82.55,52.7 82.55,45.08 82.87,44.77 Q3.B
  Bottom 0.254: v113.03,54.93 112.71,55.24 105.73,55.24 105.09,54.61 v88.27,54.61
N$6
  Top 0.254: U7.P$58 86.36,40.64 87.31,40.64 U7.P$57
N$7  (via drill 0.61)
  Top 0.254: v110.49,53.66 111.12,53.02 111.12,50.16 115.57,50.16 RN4.1 | v46.35,53.34 11.43,18.41 D7.2
  Route2 0.254: v110.49,53.66 90.49,53.66 88.27,55.88 68.58,55.88 66.04,53.34 v46.35,53.34
N$8  (via drill 0.61)
  Top 0.254: v90.49,42.23 90.49,40.96 90.17,40.64 U7.P$55 | v99.69,42.23 105.41,42.23 105.41,45.72 RI.TP
  Bottom 0.254: v99.69,42.23 v90.49,42.23
N$9  (via drill 0.61)
  Top 0.254: 67.31,50.48 69.53,48.26 T1.3 | 67.31,50.48 67.31,52.07 69.85,54.61 75.56,54.61 75.56,47.62 76.2,46.99 Q5.C | v48.26,48.26 40.96,40.96 40.96,10.16 40.64,9.84 R8.2 | 67.31,50.48 v66.67,49.85
  Bottom 0.254: v48.26,48.26 49.85,49.85 v66.67,49.85
N$10  (via drill 0.61)
  Top 0.254: v38.73,24.45 38.73,11.75 36.83,9.84 R7.2 | v71.12,48.58 72.39,47.31 Q6.C
  Route2 0.254: v38.73,24.45 56.83,42.55 59.05,42.55 65.09,48.58 v71.12,48.58
N$11  (via drill 0.61)
  Top 0.254: 39.37,6.98 40.64,6.98 R8.1 | 39.37,6.98 32.07,6.98 31.11,7.94 29.21,7.94 C6.1 | v123.19,35.24 124.46,35.24 R9.2 | v74.29,43.18 71.75,43.18 71.75,44.45 Q6.B | v39.37,7.94 39.37,6.98
  Route2 0.254: v93.03,37.78 88.58,37.78 88.27,37.47 80.01,37.47 v74.29,43.18
  Route3 0.254: v39.37,7.94 47.62,16.19 47.62,16.51 v74.29,43.18
  Bottom 0.254: v123.19,35.24 121.6,36.83 110.81,36.83 109.54,38.1 93.34,38.1 v93.03,37.78
N$12  (via drill 0.61)
  Top 0.254: v92.71,9.52 92.71,6.67 94.93,6.67 95.88,7.62 R11.2 | v74.61,41.59 75.25,42.23 75.25,44.45 Q5.B
  Route2 0.254: v92.71,9.52 92.71,12.38 74.61,30.48 v74.61,41.59
N$13  (via drill 0.61)
  Top 0.254: v42.86,8.89 44.45,8.89 R12.2 | R7.1 36.83,8.25 v38.1,8.25 39.69,9.84 39.69,40 40.32,40.64 40.32,41.59 v53.02,54.29 | v65.72,55.56 65.72,48.26 T2.3 | v97.47,55.56 103.19,55.56 103.19,44.77 103.5,44.45 D1.A
  Bottom 0.254: v38.1,8.25 38.73,8.89 v42.86,8.89 | v97.47,55.56 97.16,55.88 66.04,55.88 v65.72,55.56 65.41,55.24 53.97,55.24 v53.02,54.29
N$14  (via drill 0.61)
  Top 0.254: v96.52,9.52 94.61,7.62 R11.1 | v121.6,16.51 121.92,16.83 121.92,35.88 123.19,37.15 124.46,37.15 R1.1 | D2.C 89.53,44.45 89.53,42.55 v89.22,42.23
  Route3 0.254: v89.22,42.23 89.22,27.62 96.52,20.32 v96.52,9.52
  Bottom 0.254: v96.52,9.52 97.16,10.16 111.12,10.16 112.4,11.43 114.94,11.43 120.01,16.51 v121.6,16.51
NETB  (via drill 0.61)
  Top 0.254: RN1.1 122.24,50.16 122.56,50.16 RN1.2 122.87,50.16 122.87,50.48 123.19,50.8 125.09,50.8 v125.09,53.02 | v89.22,53.66 87.63,52.07 87.63,48.58 86.68,47.62 86.68,44.77 Q2.B
  Bottom 0.254: v125.09,53.02 124.14,53.97 112.71,53.97 112.08,54.61 106.04,54.61 105.09,53.66 v89.22,53.66
NETL  (via drill 0.61)
  Top 0.254: RN1.5 124.14,51.43 123.82,51.43 RN1.6 123.51,51.75 v123.51,54.93 | v104.78,55.56 104.14,54.93 NET.C
  Bottom 0.254: v123.51,54.93 122.56,55.88 105.09,55.88 v104.78,55.56
NETLIGHT  (via drill 0.61)
  Top 0.254: v114.3,54.93 119.7,54.93 122.87,51.75 RN1.7 | v71.44,35.56 72.07,34.92 72.07,33.02 73.03,32.07 73.66,32.07 U7.P$6
  Route3 0.254: v114.3,54.93 112.08,52.7 102.23,52.7 101.92,53.02 89.85,53.02 88.9,52.07 83.19,52.07 77.15,46.04 77.15,41.27 v71.44,35.56
NETR  (via drill 0.61)
  Top 0.254: RN1.3 123.82,50.16 124.14,50.16 RN1.4 124.46,49.85 v125.41,49.85 | v89.53,46.99 87.63,46.99 Q2.C
  Bottom 0.254: v125.41,49.85 125.41,47.94 112.4,47.94 109.54,50.8 102.55,50.8 100.01,48.26 95.25,48.26 94.61,47.62 90.17,47.62 v89.53,46.99
PWRIN  (via drill 0.61)
  Top 0.254: C5.1 124.46,21.91 126.05,20.32 126.05,8.57 124.46,8.57 R4.2 124.46,8.25 123.51,7.3 123.51,6.35 120.01,6.35 v118.11,8.25 117.79,8.57 117.79,43.5 115.57,45.72 PC2.+ | T1.2 67.63,47.94 67.63,46.04 65.09,46.04 T2.1 64.77,46.04 62.55,46.04 v62.55,48.58 | 80.01,6.67 79.69,6.35 79.69,4.76 76.84,1.9 41.91,1.9 U6.1 41.91,40.64 v49.85,48.58 | 80.01,6.67 80.96,7.62 PC3.+ | v83.19,3.17 80.01,6.35 80.01,6.67
  Bottom 0.254: v49.85,48.58 v62.55,48.58 | v118.11,8.25 113.03,3.17 v83.19,3.17
PWRKEY  (via drill 0.61)
  Top 0.254: v95.88,49.85 95.88,48.89 U8.P$3 | v85.09,48.26 83.82,46.99 Q3.C | v9.21,13.33 7.62,13.33 KEY.1 | POWER.1 v16.51,13.97 | v78.1,5.71 78.1,8.25 79.38,9.52 79.38,11.11 79.69,11.43 U7.P$18
  Route3 0.254: v85.09,48.26 85.09,41.59 74.61,31.11 74.61,10.79 78.1,7.3 v78.1,5.71
  Bottom 0.254: v95.88,49.85 94.3,48.26 v85.09,48.26 | v9.21,13.33 9.84,13.97 v16.51,13.97 24.76,5.71 v78.1,5.71
RESET_ARDUINO  (via drill 0.61)
  Top 0.254: v98.74,6.03 98.74,1.27 41.59,1.27 41.27,1.59 41.27,2.86 33.02,2.86 28.26,7.62 28.26,10.48 27.3,10.48 25.72,12.06 25.72,13.33 25.08,13.97 RESET.1
  Route3 0.254: v98.74,6.03 104.14,6.03 107,3.17 116.2,3.17 U14.1
RON  (via drill 0.61)
  Top 0.254: v113.98,5.4 123.51,5.4 124.14,6.03 124.14,6.35 124.46,6.67 R4.1 | v47.62,12.7 43.18,17.14 U6.2
  Bottom 0.254: v113.98,5.4 113.03,6.35 110.81,6.35 109.54,7.62 77.79,7.62 76.52,8.89 61.59,8.89 60.96,8.25 52.39,8.25 47.94,12.7 v47.62,12.7
RXD_3V  (via drill 0.61)
  Top 0.254: v71.12,52.7 71.12,52.39 70.48,51.75 U5.4 | v81.91,42.55 82.23,42.23 82.23,40.64 U7.P$61
  Route2 0.254: v71.12,52.7 71.75,52.7 v81.91,42.55
SCL  (via drill 0.61)
  Top 0.254: v63.5,44.45 67.31,44.45 68.58,43.18 68.58,42.86 U1.6 | v34.29,14.6 31.43,14.6 31.43,14.29 31.11,13.97 U$1.5 | U14.28 112.08,6.67 v112.08,4.13
  Route2 0.254: v63.5,44.45 63.5,43.81 60.01,40.32 | v34.29,14.6 60.01,40.32 | v112.08,4.13 95.57,4.13 76.52,23.18 76.52,23.81 60.01,40.32
SDA  (via drill 0.61)
  Top 0.254: v64.77,43.18 64.77,42.86 65.72,42.86 U1.1 | v37.15,41.59 26.99,31.43 26.99,13.33 27.3,13.02 27.62,13.02 U$1.3
  Route3 0.254: U14.27 112.08,10.16 109.54,12.7 99.06,12.7 v98.74,13.02
  Bottom 0.254: v64.77,43.18 63.18,41.59 v37.15,41.59 36.51,41.59 36.51,36.51 37.15,35.88 61.28,35.88 61.28,22.86 65.09,19.05 69.85,19.05 76.52,12.38 98.11,12.38 v98.74,13.02
SIM_CLK  (via drill 0.61)
  Top 0.254: v122.87,38.73 123.51,39.37 123.51,42.23 RN3.3 | v75.56,16.83 74.93,16.19 73.66,16.19 U7.P$14
  Route3 0.254: v122.87,38.73 120.97,36.83 120.33,36.83 114.3,30.8 114.3,9.84 113.35,8.89 110.81,8.89 109.54,7.62 84.77,7.62 v75.56,16.83
SIM_CLKR  (via drill 0.61)
  Top 0.254: v120.97,42.23 120.97,43.18 123.19,43.18 123.51,43.5 123.51,43.81 RN3.6 | v110.81,41.91 109.54,40.64 98.74,40.64 98.74,42.23 97.79,43.18 97.79,45.72 96.52,46.99 94.93,46.99 94.93,47.31 94.61,47.62 U8.P$6 | v39.05,40.64 39.05,26.35 37.15,24.45 X3.C3
  Bottom 0.254: v120.97,42.23 120.65,41.91 v110.81,41.91 109.54,40.64 v39.05,40.64
SIM_DATA  (via drill 0.61)
  Top 0.254: v124.46,40.32 124.46,42.23 RN3.4 | v75.56,18.1 74.93,17.46 73.66,17.46 U7.P$13
  Bottom 0.254: v124.46,40.32 124.46,29.21 119.7,29.21 114.3,23.81 114.3,19.05 110.81,19.05 109.54,17.78 105.73,17.78 104.78,16.83 76.84,16.83 v75.56,18.1
SIM_DATAR  (via drill 0.61)
  Top 0.254: v124.46,45.08 124.46,44.13 RN3.5 | v102.23,46.67 100.01,46.67 99.38,46.04 98.42,46.04 96.84,47.62 96.2,47.62 U8.P$1 | v13.02,24.45 11.43,24.45 X3.C7
  Route2 0.254: v124.46,45.08 121.28,48.26 111.12,48.26 110.49,48.89 110.17,48.89 109.54,48.26 103.82,48.26 v102.23,46.67
  Route3 0.254: v91.44,46.67 92.39,45.72 101.28,45.72 v102.23,46.67
  Bottom 0.254: v13.02,24.45 31.11,42.55 62.86,42.55 66.04,45.72 90.49,45.72 v91.44,46.67
SIM_RST  (via drill 0.61)
  Top 0.254: v125.41,34.29 125.41,38.1 123.82,38.1 123.51,37.78 122.56,37.78 121.92,38.42 121.92,41.27 122.87,42.23 RN3.2 | v75.56,15.56 74.93,14.92 73.66,14.92 U7.P$15
  Route2 0.254: v125.41,34.29 125.41,13.33 120.97,8.89 120.01,8.89 114.3,3.17 89.85,3.17 77.47,15.56 v75.56,15.56
SIM_RSTR  (via drill 0.61)
  Top 0.254: v121.92,45.08 122.87,44.13 RN3.7 | v92.71,46.67 93.34,47.31 93.34,47.94 93.66,48.26 U8.P$5 | v37.46,36.83 35.56,34.92 35.56,28.26 36.83,26.99 X3.C2
  Route2 0.254: v87.95,38.42 92.71,43.18 v92.71,46.67
  Bottom 0.254: v121.92,45.08 121.28,45.72 93.66,45.72 v92.71,46.67 | v37.46,36.83 38.1,37.47 87,37.47 v87.95,38.42
SIM_VDD  (via drill 0.61)
  Top 0.254: v93.34,51.43 93.34,49.85 94.3,48.89 U8.P$4 | v46.67,49.85 38.1,41.27 38.1,37.47 38.42,37.15 38.42,30.8 37.15,29.53 X3.C1 | v8.89,7.94 10.16,7.94 C9.1 | v72.07,4.76 72.07,18.41 73.66,18.41 U7.P$12
  Bottom 0.254: v93.34,51.43 92.07,52.7 74.93,52.7 73.98,51.75 48.58,51.75 v46.67,49.85 6.03,49.85 6.03,15.24 8.89,12.38 v8.89,7.94 13.33,7.94 16.19,5.08 71.75,5.08 v72.07,4.76
SOIL_HYDRO_ANALOG
  Top 0.254: JP2.4 97.16,56.52 109.54,56.52 109.54,50.8 111.76,48.58 111.76,21.59 U14.23
SPK1N  (via drill 0.61)
  Top 0.254: v83.82,35.88 83.82,11.43 U7.P$21
  Bottom 0.254: v83.82,35.88 84.14,35.56 107.95,35.56 S1N.TP
SPK1P  (via drill 0.61)
  Top 0.254: v90.49,28.26 85.41,23.18 85.41,11.75 85.09,11.43 U7.P$22
  Route3 0.254: v90.49,28.26 95.57,28.26 96.52,27.3 104.78,27.3 S1P.TP
SPK2P  (via drill 0.61)
  Top 0.254: v82.55,20 82.55,11.43 U7.P$20
  Bottom 0.254: v82.55,20 82.87,20.32 107.95,20.32 S2P.TP
SS  (via drill 0.61)
  Top 0.254: v122.24,7.62 122.24,8.25 124.46,10.48 C7.1 | v65.41,7.94 51.75,7.94 51.75,20.64 50.48,21.91 46.99,21.91 U6.5
  Route2 0.254: v122.24,7.62 116.52,1.9 71.44,1.9 v65.41,7.94
STATUS  (via drill 0.61)
  Top 0.254: v122.24,48.89 122.24,48.58 122.87,47.94 RN2.7 | v92.07,38.73 91.44,39.37 91.44,40.32 U7.P$54
  Route2 0.254: v122.24,48.89 111.44,48.89 109.54,50.8 104.14,50.8 v92.07,38.73
STATUSB  (via drill 0.61)
  Top 0.254: RN2.1 122.24,46.36 122.56,46.36 RN2.2 122.87,46.36 122.87,46.67 123.19,46.99 126.37,46.99 126.37,53.34 123.82,55.88 111.76,55.88 v111.76,53.66 | v80.64,42.23 79.38,43.5 79.38,44.45 Q4.B
  Route2 0.254: v111.76,53.66 109.54,51.43 102.23,51.43 99.69,48.89 85.72,48.89 85.41,49.21 84.77,49.21 84.14,48.58 84.14,42.23 83.19,41.27 81.6,41.27 v80.64,42.23
STATUSL  (via drill 0.61)
  Top 0.254: RN2.5 124.14,47.62 123.82,47.62 RN2.6 123.51,47.94 v123.51,48.89 | v97.47,51.12 99.06,51.12 STA.C
  Bottom 0.254: v123.51,48.89 120.97,51.43 102.23,51.43 101.92,51.12 v97.47,51.12
STATUSR  (via drill 0.61)
  Top 0.254: RN2.4 124.14,46.36 123.82,46.36 RN2.3 123.51,46.04 123.51,45.4 v123.19,45.08 | v81.6,49.21 80.01,47.62 Q4.C
  Route3 0.254: v123.19,45.08 117.47,50.8 98.42,50.8 96.52,48.89 85.72,48.89 85.41,49.21 v81.6,49.21
TXD_3V  (via drill 0.61)
  Top 0.254: U4.2 73.66,52.7 v73.98,53.02 | v83.19,42.55 83.5,42.23 83.5,40.64 U7.P$60
  Route2 0.254: v73.98,53.02 73.98,51.75 v83.19,42.55
VBATT  (via drill 0.61)
  Top 0.254: U7.P$51 95.25,40.64 94.3,40.64 U7.P$52 93.98,40.64 v93.98,46.67 | U7.P$50 96.52,40.64 95.57,40.64 U7.P$51 | v99.06,46.99 STA.A | V3.TP 109.22,48.26 104.14,48.26 NET.A | 124.46,16.19 125.41,17.14 125.41,18.73 124.46,19.68 R3.2 124.46,20 123.51,20.96 123.51,22.86 125.09,22.86 125.41,23.18 125.41,24.76 124.46,25.72 C2.1 | 17.78,7.94 13.97,7.94 C4.1 | 17.78,7.94 21.59,7.94 | 17.78,7.94 C3.1 | v87.31,4.44 87.31,7.62 PC1.+ | V1.TP 105.41,12.7 105.41,7.62 V2.TP | v50.16,4.13 50.16,18.41 49.53,19.05 U6.7 | v25.4,4.13 21.59,7.94 | 21.59,7.94 C1.1 | v123.51,17.14 124.46,16.19 | 124.46,16.19 R2.2 | v95.25,14.29 95.25,40.32 U7.P$51
  Bottom 0.254: V3.TP 107.95,48.26 106.36,48.26 105.73,47.62 99.69,47.62 v99.06,46.99 94.3,46.99 v93.98,46.67 | V2.TP 105.41,5.08 87.95,5.08 v87.31,4.44 83.19,4.44 82.55,3.81 50.48,3.81 v50.16,4.13 v25.4,4.13 | v123.51,17.14 121.6,19.05 116.2,19.05 113.66,16.51 110.81,16.51 109.54,15.24 108.9,15.24 107.63,13.97 V1.TP 95.57,13.97 v95.25,14.29
VIN  (via drill 0.61)
  Top 0.254: v125.73,40.32 124.46,39.05 R1.2 | v101.6,43.18 99.69,43.18 99.69,44.45 D1.C | 64.77,52.07 64.77,55.88 65.41,56.52 76.2,56.52 76.2,48.58 77.15,47.62 77.15,44.77 Q5.E 77.15,44.45 v78.42,43.18 | 64.77,52.07 64.77,48.89 64.13,48.26 T2.2 | v48.26,11.11 48.26,8.25 44.45,8.25 R12.1 | v63.18,26.04 62.86,26.35 62.86,42.55 61.28,44.13 61.28,48.58 64.77,52.07
  Route2 0.254: v63.18,26.04 v48.26,11.11
  Bottom 0.254: v125.73,40.32 122.87,43.18 v101.6,43.18 101.28,43.5 78.74,43.5 v78.42,43.18
VRTC  (via drill 0.61)
  Top 0.254: v84.14,38.42 82.87,37.15 82.87,22.86 77.47,17.46 77.47,6.35 75.88,6.35 74.93,7.3 74.93,11.75 73.66,13.02 U7.P$16
  Route3 0.254: v84.14,38.42 90.81,45.08 102.23,45.08 VRTC.TP